# Altium PCB PCB1.PcbDoc
Units mil, origin at the board's own origin, x right, y up, seen from the top; angles counter-clockwise.
Board outline 6000 x 4000 mil, 2 copper layers (Top Layer, Bottom Layer); 94 components, 88 nets, 321 pads, 108 vias.
Unrouted connection lines stored in the file: 2.
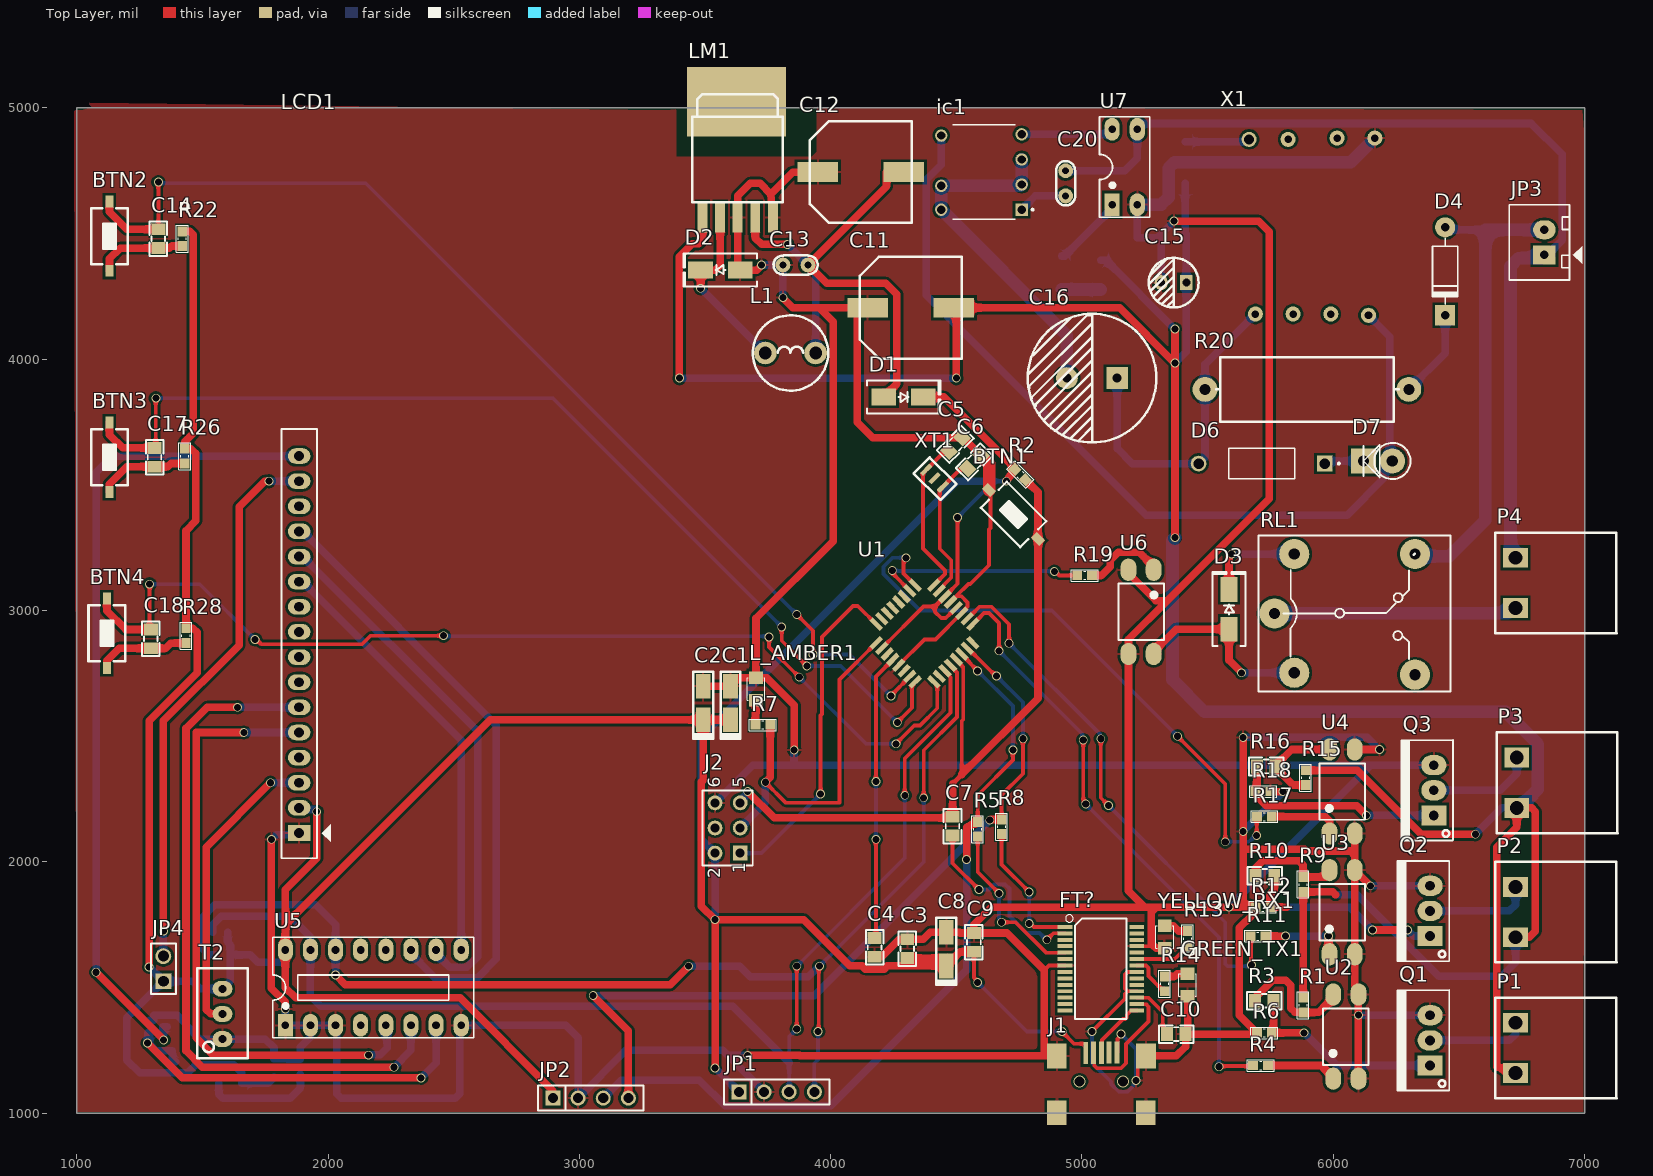
[diagram p0: Top Layer view]
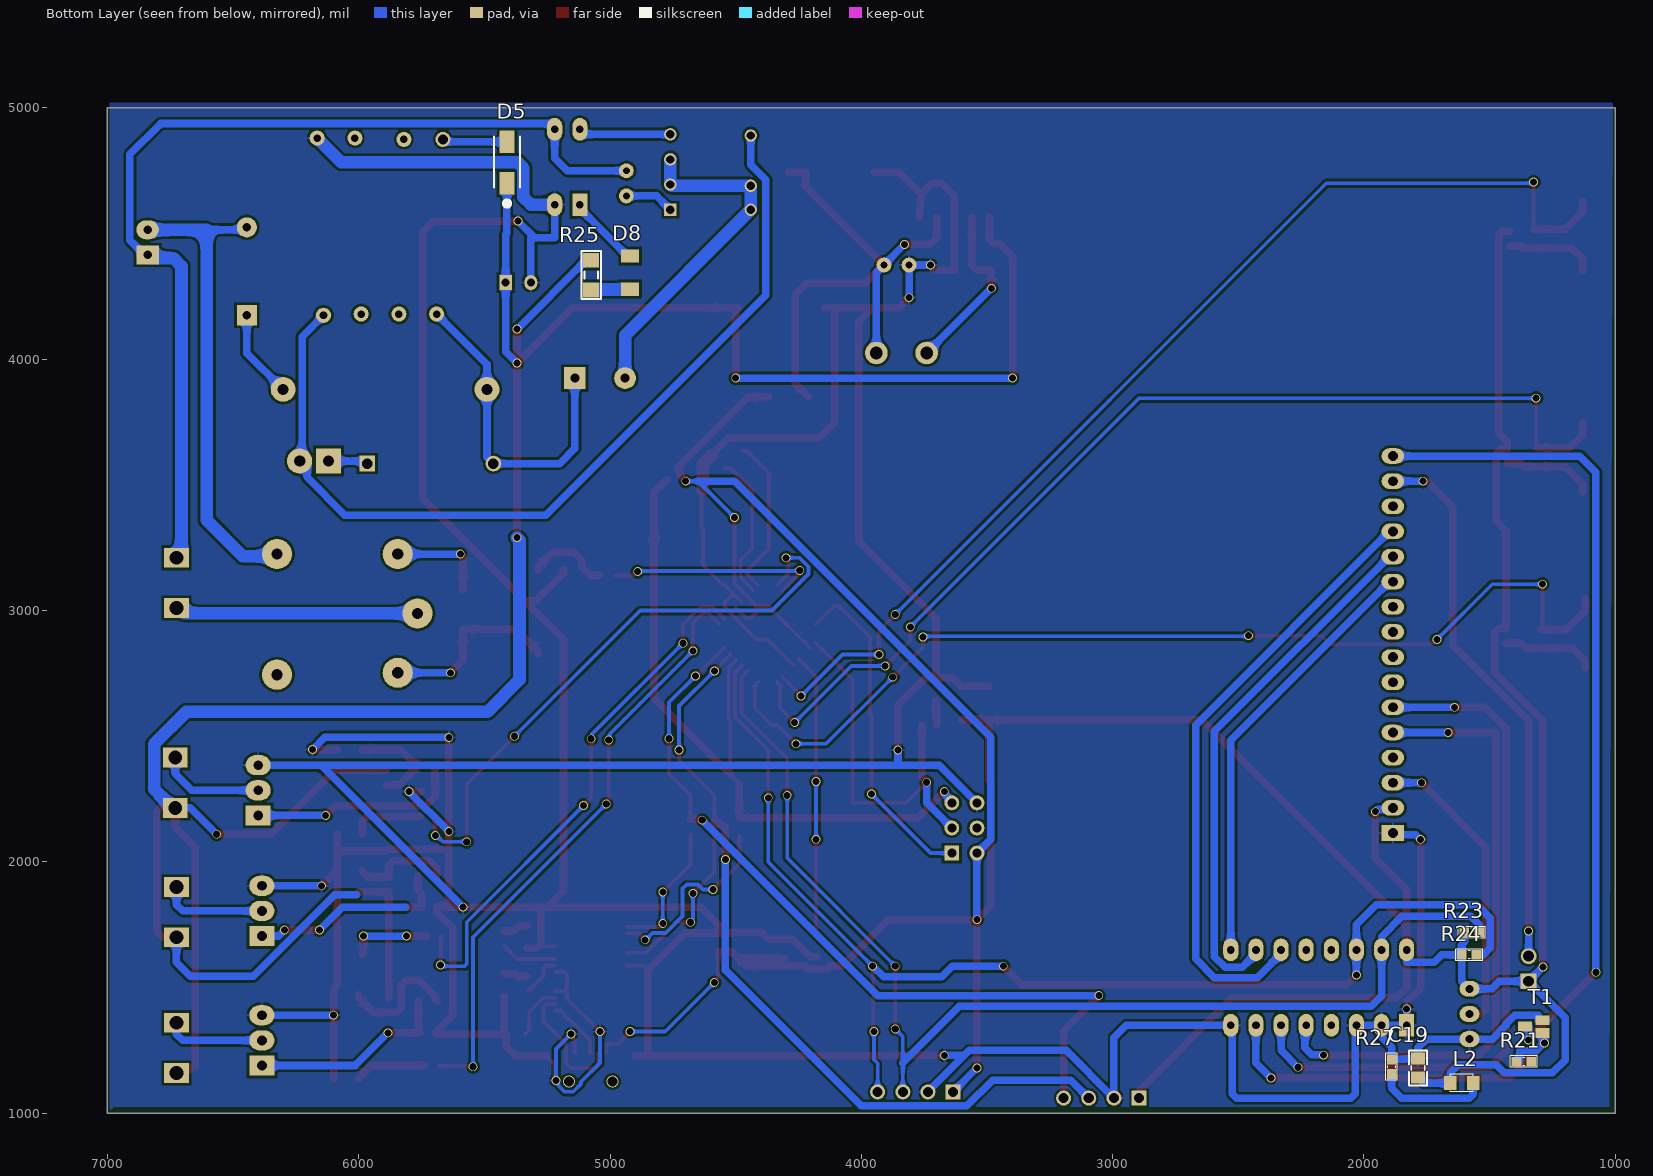
[diagram p1: Bottom Layer view, seen from below]

## Layer stack, top to bottom
Top Solder: solder mask 0.4, Solder Resist, Dk 3.5
Top Layer: signal copper 1.4
Dielectric 1: dielectric 12.6, FR-4, Dk 4.8
Bottom Layer: signal copper 1.4
Bottom Solder: solder mask 0.4, Solder Resist, Dk 3.5

## Board outline
1000,1000 7000,1000 7000,5000 1000,5000

## Design rules (kind name [scope] priority, off if disabled: settings)
Clearance [All] p1: gap=10 ignorepadtopadclearanceinfootprint=FALSE except(0: Arc-Hole Track-Hole SMDPad-Hole THPad-Hole Via-Hole Fill-Hole Poly-Hole Region-Hole Text-Hole)
PolygonConnect [All] p1: connectstyle=Relief reliefconductorwidth=10 reliefentries=4 polygonreliefangle="90 Angle" airgapwidth=10
RoutingVias [All] p1: holewidth=28 width=35 viastyle="Through Hole" minholewidth=28 minwidth=35 maxholewidth=28 maxwidth=35
SolderMaskExpansion SolderMaskExpansion_1 [All] p1: expansion=4 istentingtop=FALSE
SolderMaskExpansion [IsVia] p2: expansion=4 istentingtop=TRUE
Width [All] p1: maxlimit=50 minlimit=15 preferedwidth=30
30 further rules are at their usual default settings.

## Components (designator, comment, footprint, x,y, rotation, side; value= is the part's Value field where it differs from the comment)
BTN1 "Nut Nhan 2 Chan SMD 3x6x2.5" "Nut Nhan 2 Chan SMD 3x6x2.5" 4727.56,3382.44 r315 top
BTN2 "Nut Nhan 2 Chan SMD 3x6x2.5" "Nut Nhan 2 Chan SMD 3x6x2.5" 1130,4490 r90 top
BTN3 "Nut Nhan 2 Chan SMD 3x6x2.5" "Nut Nhan 2 Chan SMD 3x6x2.5" 1130,3610 r90 top
BTN4 "Nut Nhan 2 Chan SMD 3x6x2.5" "Nut Nhan 2 Chan SMD 3x6x2.5" 1120,2910 r90 top
C1 "4.7uF" "tu tantalum smd3216" 3601.5,2632.37 r90 top
C2 "4.7uF" "tu tantalum smd3216" 3492.76,2632.37 r90 top
C3 "0.1uF" "tu 0805" 4305,1655 r270 top
C4 "0.1uF" "tu 0805" 4175,1660 r270 top
C5 "15pF" "tu 0805" 4496.23,3661.42 r45 top
C6 "15pF" "tu 0805" 4571.23,3591.42 r45 top
C7 "0.1uF" "tu 0805" 4484.87,2142.23 r90 top
C8 "4.7uF" "tu tantalum smd3216" 4460,1653.07 r90 top
C9 "0.1uF" "tu 0805" 4570,1680 r270 top
C10 "0.1uF" "tu 0805" 5375,1315 r0 top
C11 "1000uF" "tu nhom 10 (G)" 4318.74,4205 r0 top
C12 "470uF" "tu nhom 10 (G)" 4120,4745 r0 top
C13 "106" "tu gom" 3860,4375 r180 top
C14 "102" "tu 0805" 1325,4480 r270 top
C15 "47uF" "tu hoa 5mm" 5365,4305 r180 top
C16 "10uF" "tu hoa 13mm" 5040,3925 r180 top
C17 "102" "tu 0805" 1310,3610 r270 top
C18 "102" "tu 0805" 1295.13,2887.57 r270 top
C19 "104" "tu 0805" 1785,1180 r270 bottom
C20 "104" "tu gom" 4935,4700 r270 top
D1 "SS34" "DIODE SMA" 4290,3850 r0 top
D2 "SS34" "DIODE SMA" 3561.26,4355 r180 top
D3 "M7" "DIODE SMA" 5585,3005 r90 top
D4 "1N4007" D1A 6445,4525 r90 top
D5 "MBRA160T3G" DIOM5226X220N 5410,4785 r90 bottom
D6 "P6KE200A" DIOAD1276W78L760D360 5715,3585 r180 top
D7 "2A 1000v" "DIODE 2A DUNG" 6175,3595 r0 top
D8 "12V" "DIODE ZENNER SMD SOD80" 4920,4345 r90 bottom
FT? "FT232RL" SSOP28-0.65-10.2X5.2MM 5075,1575 r270 top
GREEN_TX1 "LED2" LED-0805-Green 5420,1465 r90 top
ic1 "TNY266_2" DIP762W46P254L957H406Q7 4610,4745 r180 top
J1 "USB Micro 5p SMD" "USB Mini 5p SMD" 5080,1105 r180 top
J2 "Header 3X2" HDR2X3 3640,2035 r90 top
JP1 "JP 1x4 2.54" "JP 1x4 CT" 3635,1085 r0 top
JP2 "JP 1x4 2.54" "JP 1x4 CT" 2895,1060 r0 top
JP3 "JP2" CON2 6840,4415 r90 top value="Connector 2"
JP4 "JP 1x2 2.54" "JP 1x2 DT" 1345,1525 r90 top
L1 "470uH - 3A" "CUON CAM 100uH3A" 3840,4025 r0 top
L2 "LED 0805" LED-0805-Green 1656,1120 r180 bottom
L_AMBER1 "LED3" LED-0805-Red 3702.87,2643.37 r90 top
LCD1 "LCD1602 XL" "LCD1602 with Jump" 1885,2115 r90 top
LM1 "LM2576 12V SMD" TO263-5 3630,4795 r0 top
P1 "CON 2 EDG5.08" "CON 2 2EDG5.08" 6725,1360 r270 top
P2 "CON 2 EDG5.08" "CON 2 2EDG5.08" 6725,1900 r270 top
P3 "CON 2 EDG5.08" "CON 2 2EDG5.08" 6730,2415 r270 top
P4 "CON 2 EDG5.08" "CON 2 2EDG5.08" 6725,3210 r270 top
Q1 "IRFZ44" TO220 6385,1190 r90 top
Q2 "IRFZ44" TO220 6385,1705 r90 top
Q3 "IRFZ44" TO220 6400,2185 r90 top
R1 "10k" "tro smd 0603" 5880,1430.47 r270 top
R2 "1k" "tro smd 0603" 4754.12,3540.88 r135 top
R3 "100R" "tro smd 0805" 5725,1450 r0 top
R4 "680R" "tro smd 0603" 5710.47,1190 r0 top
R5 "1k" "tro smd 0603" 4585,2130 r90 top
R6 "10k" "tro smd 0603" 5725.47,1320 r180 top
R7 "680R" "tro smd 0603" 3730,2545 r180 top
R8 "1k" "tro smd 0603" 4680,2140 r90 top
R9 "10k" "tro smd 0603" 5880,1910 r90 top
R10 "100R" "tro smd 0805" 5727.23,1947.39 r0 top
R11 "680R" "tro smd 0603" 5700,1705 r0 top
R12 "10k" "tro smd 0603" 5719.53,1820 r180 top
R13 "680R" "tro smd 0603" 5420,1695 r90 top
R14 "680R" "tro smd 0603" 5329.11,1514.96 r90 top
R15 "10k" "tro smd 0603" 5890,2335 r270 top
R16 "100R" "tro smd 0805" 5733.24,2377.61 r180 top
R17 "680R" "tro smd 0603" 5725.47,2180 r0 top
R18 "10k" "tro smd 0603" 5720.47,2280 r0 top
R19 "680R" "tro smd 0603" 5010.47,3140 r0 top
R20 "22R" "tro vach 2w" 5895,3880 r180 top
R21 "4.7k" "tro smd 0603" 1364,1205 r0 bottom
R22 "1k" "tro smd 0603" 1420,4479.53 r270 top
R23 "4.7k" "tro smd 0603" 1571.47,1720 r180 bottom
R24 "4.7k" "tro smd 0603" 1581.47,1630 r180 bottom
R25 "1k" "tro smd 1206" 5075,4335 r270 bottom
R26 "1k" "tro smd 0603" 1430,3615 r270 top
R27 "1k" "tro smd 0603" 1890,1185 r90 bottom
R28 "1k" "tro smd 0603" 1435,2900 r270 top
RL1 "Relay" "Relay 5 Chan SRD" 5765.94,2988.78 r0 top
T1 "BC847" SOT23 1325,1345 r90 bottom
T2 "10K" "Bien Tro Vi Chinh Dung" 1580,1395 r90 top
U1 "ATMEGA168-20AU" ATMEGA168 4370,2905 r225 top
U2 "OPTO PC817 SMD" SOP4 6050,1305 r90 top value=PC817
U3 "OPTO PC817 SMD" SOP4 6035,1800 r90 top value=PC817
U4 "OPTO PC817 SMD" SOP4 6035,2280 r90 top value=PC817
U5 "PCF8574" DIP16 1830,1350 r0 top
U6 "OPTO PC817 SMD" SOP4 5235,2995 r270 top value=PC817
U7 "OPTO PC817 DIP4" DIP4 5120,4612.48 r0 top value=PC817
X1 "flyback tranformer" "flyback transformer" 5690,4180 r90 top
XT1 "16Mhz" "Thach Anh 3 Chan SMD" 4446.81,3493.19 r135 top value=4Mhz
YELLOW_RX1 "LED1" LED-0805-Yellow 5329.11,1656 r90 top

## Footprints (in the part's own frame and the unit in brackets; to place one, negate y for a bottom-side part, rotate by r counter-clockwise, add the part's x,y. Pads: shape width x height; smd on the part's side, far side on the other; paste and mask are expansions set on the pad)
ATMEGA168 [mil]
  rect 58x20 smd: 1(-167,110) 2(-167,79) 3(-167,47) 4(-167,16) 5(-167,-16) 6(-167,-47) 7(-167,-79) 8(-167,-110) 17(157,-110) 18(157,-79) 19(157,-47) 20(157,-16) 21(157,16) 22(157,47) 23(157,79) 24(157,110)
  rect 20x58 smd: 9(-115,-162) 10(-84,-162) 11(-52,-162) 12(-21,-162) 13(11,-162) 14(42,-162) 15(74,-162) 16(105,-162) 25(105,162) 26(74,162) 27(42,162) 28(11,162) 29(-21,162) 30(-52,162) 31(-84,162) 32(-115,162)
  body extent -182,-177 172,177, height 46
"Bien Tro Vi Chinh Dung" [mm] "Bien tro vi chinh"
  oval 1.6x2 hole 0.8: 1(-2.54,0) 2(0,0) 3(2.54,0)
  silkscreen extent -4.47,-2.54 4.6,2.54, body extent -4.54,-2.4 4.66,2.4, height 12.02
CON2 [mil] "CON2"
  rect 75x90 hole 34: 1(0,0)
  oval 75x90 hole 34: 2(100,0)
  silkscreen extent -100,-150 200,140, body extent -68,-70 168,107, height 236
"CON 2 2EDG5.08" [mm]
  rect 2x2.5 hole 1.4: 1(0,0) 2(5.08,0)
  silkscreen extent -2.54,-2.03 7.62,10.21, body extent -2.5,-1.75 7.58,10.25, height 3.15
"CUON CAM 100uH3A" [mil] "100uH3A"
  round 90 hole 50: 1(-100,0) 2(100,0)
  silkscreen extent -150,-150 150,150, body extent -171,-175 171,167, height 394
D1A [mil] "Diode 1A, W 100mil, L 350mil"
  round 80 hole 35: 1(0,0)
  rect 80x80 hole 35: 2(-350,0)
  silkscreen extent -305,-50 -45,50, body extent -386,-33 34,36, height 84
DIOAD1276W78L760D360 [mm]
  round 1.59 hole 1.06: A(6.38,0)
  rect 1.59x1.59 hole 1.06: C(-6.38,0)
  silkscreen extent -7.89,-1.55 3.35,1.55, body extent -6.9,-1.8 6.9,1.8, height 3.6
"DIODE 2A DUNG" [mil] "Diode 2A DUNG"
  round 100 hole 45: 1(60,0)
  rect 100x100 hole 45: 2(-55,0)
  silkscreen extent -55,-72 132,72, body extent -69,-50 99,55, height 252
"DIODE SMA" [mm] "SMA"
  rect 2.5x1.7 smd: 1(-2,0) 2(2,0)
  silkscreen extent -3.68,-1.65 3.75,1.65, body extent -2.6,-1.37 2.6,1.37, height 2.4
"DIODE ZENNER SMD SOD80" [mm] "SOD80"
  rect 1.35x1.8 smd: 1(1.675,0) 2(-1.675,0)
  body extent -1.75,-0.76 1.75,0.74, height 1.45
DIOM5226X220N [mm]
  rect 2.3x1.55 smd: A(2.032,0) C(-2.15,0)
  silkscreen extent -4.62,-1.3 2.6,1.3, body extent -2.47,-1.49 2.73,1.24, height 2.7
DIP4 [mil] "W.300/L.400"
  rect 60x90 hole 31: 1(0,2.52)
  oval 60x90 hole 31: 2(100,2.52) 3(100,302.52) 4(0,302.52)
  silkscreen extent -50,-47 150,353, body extent -59,-7 159,307, height 170
DIP16 [mil] "16 PIN, W 300mil, Pin to pin 100mil"
  rect 60x90 hole 31: 1(0,0)
  oval 60x90 hole 31: 2(100,0) 3(200,0) 4(300,0) 5(400,0) 6(500,0) 7(600,0) 8(700,0) 9(700,300) 10(600,300) 11(500,300) 12(400,300) 13(300,300) 14(200,300) 15(100,300) 16(0,300)
  silkscreen extent -50,-50 750,350, body extent -52,-57 752,356, height 299
DIP762W46P254L957H406Q7 [mm]
  rect 1.25x1.25 hole 0.83: 1(-3.81,3.81)
  round 1.25 hole 0.83: 2(-3.81,1.27) 3(-3.81,-1.27) 4(-3.81,-3.81) 5(4.318,-3.683) 7(4.318,1.397) 8(4.318,3.81)
  silkscreen extent -5.02,-4.79 3.18,4.79, body extent -4.27,-4.59 4.78,4.85, height 4.06
"flyback transformer" [mil]
  round 60 hole 30: 1(0,0) 7(-5,-450) 8(700,-475) 19(0,-150) 20(0,-300) 23(695,-130) 24(700,-325)
  round 60 hole 40: 2(695,25)
  body extent -70,-599 796,149, height 561
HDR2X3 [mm] "Connector; Header; 3x2 Position"
  rect 1.5x1.5 hole 0.9: 1(0,0)
  round 1.5 hole 0.9: 2(0,2.54) 3(2.54,0) 4(2.54,2.54) 5(5.08,0) 6(5.08,2.54)
  silkscreen extent -1.27,-1.27 6.35,3.81
"JP 1x2 DT" [mm] "2 pins, 1 row, straight, gold plating"
  rect 1.6x1.6 hole 1.1: 1(0,0)
  round 1.6 hole 1.1: 2(2.54,0)
  silkscreen extent -1.27,-1.27 3.81,1.27, body extent -1.27,-1.27 3.81,1.27, height 8.54
"JP 1x4 CT" [mm]
  rect 1.52x1.52 hole 1.02: 1(0,0)
  round 1.52 hole 1.02: 2(2.54,0) 3(5.08,0) 4(7.62,0)
  silkscreen extent -1.52,-1.27 9.14,1.27, body extent -1.52,-1.25 9.14,1.25, height 8.51
"LCD1602 with Jump" [mil] "LCD dipslay 16x2, 16 pin"
  rect 62x90 hole 39: 1(0,0)
  oval 62x90 hole 39: 2(100,0) 3(200,0) 4(300,0) 5(400,0) 6(500,0) 7(600,0) 8(700,0) 9(800,0) 10(900,0) 11(1000,0) 12(1100,0) 13(1200,0) 14(1300,0) 15(1400,0) 16(1500,0)
  silkscreen extent -100,-125 1608,70, body extent -320,-1353 2850,84, height 764
LED-0805-Green [mil]
  rect 50x55 smd: 1(0,0) 2(90,0)
  silkscreen extent 0,-35 90,35, body extent 5,-25 85,25, height 43
LED-0805-Red [mil]
  rect 50x55 smd: 1(0,0) 2(90,0)
  silkscreen extent 0,-35 90,35, body extent 5,-25 85,25, height 43
LED-0805-Yellow [mil]
  rect 50x55 smd: 1(0,0) 2(90,0)
  silkscreen extent 0,-35 90,35, body extent 5,-25 85,25, height 43
"Nut Nhan 2 Chan SMD 3x6x2.5" [mm] "Switch SMD type"
  rect 1.2x0.8 smd: 1(-3.5,0) 2(3.5,0)
  silkscreen extent -2.82,-1.85 2.82,1.85, body extent -3.05,-1.85 3.05,1.85, height 2.5
"Relay 5 Chan SRD" [mil] "Relay SPDT, 5 pin, 10A,W 650mil, L 800mil, H 800mil"
  round 120 hole 45: 1(0,0) 2(559.06,236.22) 3(559.06,-243.78) 4(78.74,-236.22) 5(78.74,236.22)
  silkscreen extent -63,-311 700,310, body extent -55,-306 697,304, height 602
SOP4 [mm]
  oval 2.25x1.6 smd: 1(-4.25,1.27) 2(-4.25,-1.27) 3(4.25,-1.27) 4(4.25,1.27)
  silkscreen extent -2.85,-2.3 2.85,2.3, body extent -4.67,-2.29 4.93,2.31, height 3.6
SOT23 [mm]
  rect 1x1.4 smd: 1(-0.635,-0.889) 2(0.635,-0.889) 3(0,0.889)
  body extent -0.3,-0.49 0.3,0.51, height 0.45
SSOP28-0.65-10.2X5.2MM [mm]
  rect 0.4x1.5 smd: 1(-4.225,-3.625) 2(-3.575,-3.625) 3(-2.925,-3.625) 4(-2.275,-3.625) 5(-1.625,-3.625) 6(-0.975,-3.625) 7(-0.325,-3.625) 8(0.325,-3.625) 9(0.975,-3.625) 10(1.625,-3.625) 11(2.275,-3.625) 12(2.925,-3.625) 13(3.575,-3.625) 14(4.225,-3.625) 15(4.225,3.625) 16(3.575,3.625) 17(2.925,3.625) 18(2.275,3.625) 19(1.625,3.625) 20(0.975,3.625) 21(0.325,3.625) 22(-0.325,3.625) 23(-0.975,3.625) 24(-1.625,3.625) 25(-2.275,3.625) 26(-2.925,3.625) 27(-3.575,3.625) 28(-4.225,3.625)
  silkscreen extent -5.46,-3.55 5.1,2.6
"Thach Anh 3 Chan SMD" [mm] "SMD Crystal CMR309T package"
  rrect25% 0.45x1.35 smd: 1(0,0) 2(1.2,0) 3(2.4,0)
  silkscreen extent -0.76,-1.14 3.05,1.14, body extent -0.41,-0.63 2.79,0.67, height 1.02
TO220 [mil] "TO-220"
  rect 80x100 hole 39: 1(0,0)
  oval 80x100 hole 39: 2(100,0) 3(200,0)
  silkscreen extent -100,-76 300,130, body extent -95,-80 295,97, height 323
TO263-5 [mil] "TO263-5"
  rect 39.37x120 smd: 1(-140,-230) 2(-70,-230) 3(0,-230) 4(70,-230) 5(140,-230)
  rect 393.7x275.59 smd: 6(-5,230)
  silkscreen extent -180,-170 180,260, body extent -200,-242 200,310, height 180
"tro smd 0603" [mm] "Chip Capacitor, 2-Leads, Body 1,60x0,80mm, IPC Medium Density"
  rect 1x0.95 smd mask+0.076: 1(-0.75,0) 2(0.75,0)
  silkscreen extent -1.35,-0.58 1.37,0.58, body extent -0.82,-0.42 0.82,0.43, height 0.44
"tro smd 0805" [mm]
  rect 1.2x1.4 smd: 1(-0.946,-0.061) 2(0.954,-0.061)
  silkscreen extent -1.75,-0.97 1.75,0.84, body extent -1.56,-0.76 1.44,0.64, height 0.53
"tro smd 1206" [mm]
  rect 1.5x1.6 smd: 1(-1.5,0) 2(1.5,0)
  silkscreen extent -2.44,-0.99 2.44,0.99, body extent -1.6,-0.8 1.6,0.8, height 0.6
"tro vach 2w" [mm]
  round 2.5 hole 1.1: 1(-10.3,0) 2(10.3,0)
  silkscreen extent -9.27,-3.25 9.14,3.25, body extent -10.56,-2.5 10.56,2.5, height 5.5
"tu 0805" [mm] "Compoment SMD 80x50mil"
  rect 1.2x1.4 smd: 1(-0.946,-0.003) 2(0.954,-0.003)
  silkscreen extent -1.75,-0.89 1.75,0.89, body extent -1.01,-0.64 1.01,0.63, height 0.61
"tu gom" [mm] "Tu gom mini"
  round 1.5 hole 0.7: 1(-1.27,0) 2(1.27,0)
  silkscreen extent -2.25,-0.97 2.22,0.97, body extent -2.92,-0.85 2.92,0.85, height 6.12
"tu hoa 5mm" [mm]
  rect 1.3x1.5 hole 0.8: 1(-1.27,0)
  oval 1.3x1.5 hole 0.8: 2(1.27,0)
  silkscreen extent -2.51,-2.51 2.51,2.51, body extent -3.12,-3.18 3.23,3.18, height 14.55
"tu hoa 13mm" [mm]
  rect 2.2x2.2 hole 0.9: 1(-2.54,0)
  round 2.2 hole 0.9: 2(2.54,0)
  silkscreen extent -6.5,-6.5 6.5,6.5, body extent -6.25,-6.25 6.26,6.25, height 23.02
"tu nhom 10 (G)" [mm]
  rect 4.1x2 smd: 1(-4.35,0) 2(4.35,0)
  silkscreen extent -5.15,-5.15 5.15,5.15, body extent -5.9,-5.25 5.9,5.25, height 10.5
"tu tantalum smd3216" [mm]
  rect 2.5x1.5 smd: 1(-1.7,0) 2(1.7,0)
  silkscreen extent -3.61,-1 3.17,1, body extent -1.7,-0.9 1.7,0.9, height 1.69
"USB Mini 5p SMD" [mm]
  rect 0.5x2.25 smd: 1(1.651,-3.429) 2(0.864,-3.442) 3(0.076,-3.454) 4(-0.711,-3.467) 5(-1.499,-3.48)
  rect 2x2.5 smd: 5(-4.424,-3.124) 5(-4.42,2.616) 5(4.576,-3.124) 5(4.58,2.616)
  body extent -5.27,-3.8 5.43,5.4, height 3.95

## Part data
C1 C2 C8: library part "Tu tantalum 4.7uF 16V SMD3216", "Dán", Chung_Loai=Dán, Don_Vi=Con, Ma_Hang=MH008686, So_Chan=2, Ten_Linh_Kien="Tụ tantalum 475C-4.7uF 16V SMD3216"
C3 C4 C7 C9 C10: library part "Tu 0805 10pF 50V 10%", "Dán", Chung_Loai=Dán, Don_Vi=Con, Ma_Hang=MH004554, So_Chan=2, Ten_Linh_Kien="Tụ 0805 10P 10% 50V"
C5 C6: library part "Tu 0805 15pF 50V 10%", "Dán", Chung_Loai=Dán, Don_Vi=Con, Ma_Hang=MH004556, So_Chan=2, Ten_Linh_Kien="Tụ 0805 15P 10% 50V"
C11: library part "Tu Nhom 1000uF 10V", "Dán", Chung_Loai=Dán, Don_Vi=Con, Ma_Hang=MH007515, So_Chan=2, Ten_Linh_Kien="Tụ Nhôm 1000uF 10V"
C12: library part "Tu Nhom 470uF 35V", "Dán", Chung_Loai=Dán, Don_Vi=Con, Ma_Hang=MH004418, So_Chan=2, Ten_Linh_Kien="Tụ Nhôm 470uF 35V 10x10.5MM"
C13 C20: library part "Tu gom 104 50V", "Cắm", Chung_Loai=Cắm, Don_Vi=Con, Ma_Hang=MH004761, So_Chan=2, Ten_Linh_Kien="Tụ gốm 104 100nF 50V"
C14 C17 C18: library part "Tu 0805 102 50V 10%", "Dán", Chung_Loai=Dán, Don_Vi=Con, Ma_Hang=MH004549, So_Chan=2, Ten_Linh_Kien="Tụ 0805 102-1nF 10% 50V"
C15: library part "Tu Hoa 47uF 25V 5x8", "Cắm", Chung_Loai=Cắm, Don_Vi=Con, Ma_Hang=MH006860, So_Chan=2, Ten_Linh_Kien="Tụ Hóa 47uF 25V"
C16: library part "Tu Hoa 10uF 450V 13x20", "Cắm", Chung_Loai=Cắm, Don_Vi=Con, Ma_Hang=MH003950, So_Chan=2, Ten_Linh_Kien="Tụ Hóa 10uF 450V 13x20MM"
C19: library part "Tu 0805 104 50V 10%", "Dán", Chung_Loai=Dán, Don_Vi=Con, Ma_Hang=MH004551, So_Chan=2, Ten_Linh_Kien="Tụ 0805 104-100nF 10% 50V"
D1 D2: library part "Diode SS34 ( 1N5822 )", "Dán", Chung_Loai=Dán, Don_Vi=Con, Ma_Hang=MH002104, Ten_Linh_Kien="Diode SS34 3A 40V SMA ( 1N5822 SS34A)"
D3: library part "Diode M7 ( 4007 )", "Dán", Chung_Loai=Dán, Don_Vi=Con, Ma_Hang=MH000944, Ten_Linh_Kien="Diode M7 1N4007 SMD 1A 1000V"
D4: library part D1A, "Diode 1A"
D5: "Diode Schottky 60V 1A Surface Mount SMA", Package="DO-214 ON Semiconductor", Availability=Unavailable, MF="ON Semiconductor", MP=MBRA160T3G, Price=None, SnapEDA_Link=https://www.snapeda.com/parts/MBRA160T3G/ON%20Semiconductor/view-part/313183/?ref=snap
D6: "600W, 200V, 5%, Unidirectional, TVS", Package="AXIAL-2 Taiwan Semiconductor", Availability="In Stock", MF="Taiwan Semiconductor", MP=P6KE200A, Price=None, Purchase-URL=https://pricing.snapeda.com/search/part/P6KE200A/?ref=eda
D7: library part "Diode FR207", "Cắm", Chung_Loai=Cắm, Don_Vi=Con, Ma_Hang=MH005704, Ten_Linh_Kien="Diode FR207 2A 1000V ( DIP)"
D8: library part "Diode Zener 12V", "Dán", Chung_Loai=Dán, Don_Vi=Con, Ma_Hang=MH000945, Ten_Linh_Kien="Diode Zener 1/2W 12V SMD1206 ZMM12"
GREEN_TX1 L2: library part "LED 0805 Xanh La", "Dán", Chung_Loai=Dán, Don_Vi=Con, Ma_Hang=MH002326, Ten_Linh_Kien="LED 0805 Màu Xanh Lá (Green)"
J1: "USB Type B", Ma_Hang=MH001020, Ten="MicroUSB MK5P SMD"
J2: "Header, 3-Pin, Dual row", LatestRevisionDate=17-Jul-2002, LatestRevisionNote="Re-released for DXP Platform.", Publisher="Altium Limited"
JP1 JP2: library part "JP 1x4 2.54 Cai Thang", "Cắm", Chung_Loai=Cắm, Don_Vi=Con, Ma_Hang=MH004006, Ten_Linh_Kien="Jump Đơn Cái 2.54MM 1x20P Thẳng"
JP3: library part Con2, "Connector 2"
JP4: library part "JP 1x2 2.54 Duc Thang", "Cắm", Chung_Loai=Cắm, Don_Vi=Con, Ma_Hang=MH000903, Ten_Linh_Kien="Jump Đơn Đực 2.54MM 1x40P Thẳng 11MM"
L1: library part "CUON CAM 470uH DIP", "Cắm", Chung_Loai=Cắm, Don_Vi=Con, Ma_Hang=MH002232, Ten_Linh_Kien="Cuộn Cảm 470uH 3A 8x10MM"
L_AMBER1: library part "LED 0805 Do", "Dán", Chung_Loai=Dán, Don_Vi=Con, Ma_Hang=MH000897, Ten_Linh_Kien="LED 0805 Màu Đỏ (Red)"
LCD1: "LCD 1602 Xanh Lá", CHIP=HD44780, Ma_Hang=67HZ, NCC=NSHOP, Ten="Màn hình LCD 1602 Xanh Lá"
LM1: "Dán", Chung_Loai=Dán, Don_Vi=Con, Ma_Hang=MH002369, Ten_Linh_Kien="LM2576HVS-12V BUCK 12V 3A TO263-5"
P1 P2 P3 P4: "Cắm", Chung_Loai=Cắm, Don_Vi=Con, Ma_Hang=MH000759, Ten_Linh_Kien="CON 2 2EDG5.08-2P 5.08MM ( Xanh Cong)"
Q1 Q2 Q3: library part "IRFZ44 DIP", "N-Channel Power MOSFET"
R1 R6 R9 R12 R15 R18: library part "Tro 0603 1% 10k", "Dán", Chung_Loai=Dán, Don_Vi=Con, Ma_Hang=MH006333, So_Chan=2, Ten_Linh_Kien="Trở 0603 1% 10k"
R2 R5 R8 R27: library part "Tro 0603 1% 1k", "Dán", Chung_Loai=Dán, Don_Vi=Con, Ma_Hang=MH006334, So_Chan=2, Ten_Linh_Kien="Trở 0603 1% 1k"
R3 R10 R16: library part "Tro 0805 5% 100R", "Dán", Chung_Loai=Dán, Don_Vi=Con, Ma_Hang=MH005251, So_Chan=2, Ten_Linh_Kien="Trở 0805 5% 100R"
R4 R7 R11 R13 R14 R17 R19: library part "Tro 0603 1% 680R", "Dán", Chung_Loai=Dán, Don_Vi=Con, Ma_Hang=MH006336, So_Chan=2, Ten_Linh_Kien="Trở 0603 1% 680R"
R20: library part "Tro Vach 2W 5% 22R", "Cắm", Chung_Loai=Cắm, Don_Vi=Con, Ma_Hang=MH006369, So_Chan=2, Ten_Linh_Kien="Trở 5% 2w 22R"
R21 R23 R24: library part "Tro 0603 5% 4.7k", "Dán", Chung_Loai=Dán, Don_Vi=Con, Ma_Hang=MH006327, So_Chan=2, Ten_Linh_Kien="Trở 0603 5% 4.7k"
R22 R26 R28: library part "Tro 0603 5% 1k", "Dán", Chung_Loai=Dán, Don_Vi=Con, Ma_Hang=MH006319, So_Chan=2, Ten_Linh_Kien="Trở 0603 5% 1k"
R25: library part "Tro 1206 1% 1k", "Dán", Chung_Loai=Dán, Don_Vi=Con, Ma_Hang=MH005880, So_Chan=2, Ten_Linh_Kien="Trở 1206 1% 1k"
RL1: library part "Relay 5 Chan SRD", "Relay 5 Chan", Ma_Hang=MH009374, Ten="Relay 5V10A SRD-05VDC-SL-C Chính Hãng"
T1: "Bipolar _BJT_ Transistor NPN 45V 100mA 100MHz 150mW Surface Mount SOT-523", Package="SOT-523 Rectron", Availability=Unavailable, MF=Rectron, MP=BC847, Price=None, SnapEDA_Link=https://www.snapeda.com/parts/BC847/Rectron/view-part/4637030/?ref=snap
T2: library part "Bien Tro Tinh Chinh 10K Dung", "Cắm", Chung_Loai=Cắm, Don_Vi=Con, Ma_Hang=MH003232, Ten_Linh_Kien="Biến Trở VR 103-10K 3296W"
U1: "AVR AVRÂ® ATmega Microcontroller IC 8-Bit 20MHz 16KB _8K x 16_ FLASH 32-TQFP _7x7_", Package="TQFP-32 Microchip", Availability=Unavailable, MF=Microchip, MP=ATMEGA168-20AU, Price=None, SnapEDA_Link=https://www.snapeda.com/parts/ATMEGA168-20AU/Microchip/view-part/776709/?ref=snap
U2 U3 U4 U6 U7: "Single Opto"
U5: "I2C PORT EXPANDER", Frequency - Clock=100KHz, Manufacturer="NXP Semiconductors", Manufacturer Part Number=PCF8574T/3,512, Operating Temperature="-40°C ~ 85°C", Package / Case="16-SOIC (7.5mm Width)", Supplier Part Number=568-1076-5-ND, Voltage - Supply="2.5 V ~ 6 V", Category="Integrated Circuits (ICs)", Includes=POR, Interface=I²C, Interrupt Output=Yes, Number of I /O=8, Packaging=Tube, RoHS="RoHS Compliant", Supplier=Digi-Key, Supplier 1=Digi-Key, Supplier Part Number 1=568-1076-5-ND
XT1: library part "Thach anh 3 Chan SMD", "Crystal For all Crystal 2pin."
YELLOW_RX1: library part "LED 0805 Vang", "Dán", Chung_Loai=Dán, Don_Vi=Con, Ma_Hang=MH002329, Ten_Linh_Kien="LED 0805 Màu Vàng ( Yellow)"
BTN1 BTN2 BTN3 BTN4: Ma_Hang=MH001036, Ten="Nút Nhấn 2 Chân 3x6x2.5MM SMD"

## Via types
v1: diameter 35, hole 28, Top Layer to Bottom Layer, 106 vias
v2: diameter 47.24, hole 39.37, Top Layer to Bottom Layer, 2 vias

## Nets (pads, with @x,y where several pads share a name; then routed paths per layer and width w, separated by ;. In a path a pad name is that pad's centre, name@x,y a point inside that pad or via, vN(x,y) a via of type N, cw(c..) or ccw(c..) an arc to the next point about the centre after c; other vN are vias at no path point)
3V3: C10.1 FT?.17 | length 221.8
  Top Layer w15: FT?.17 5217.93,1459.63 5264.26,1459.63 5321.65,1402.23 5321.65,1330.99 C10.1
220_1: D4.1 JP3.2 RL1.2 | length 1897.8
  Bottom Layer w30: D4.1 6455,4515 6605,4515
  Bottom Layer w50: RL1.2 6334.29,3215.71 6460.71,3215.71 6605,3360 6605,4515 JP3.2
220_2: C20.1 JP3.1 P4.1 U7.3 | length 3945.9
  Bottom Layer w30: C20.1 5170,4750 5220,4800 U7.3 5220,4938 6788,4938 6910,4816 6910,4474 6851,4415 JP3.1
  Bottom Layer w50: P4.1 6719.37,3210 6705,3224.37 6705,4370 6737.5,4402.5 6827.5,4402.5 JP3.1
+5: C1.1 C2.1 C3.2 C8.1 C9.2 C19.2 D1.2 J1.1 J2.2 JP1.1 JP2.1 JP4.1 L2.1 LCD1.2 R2.2 R22.1 R23.1 R24.1 R26.1 R28.1 T2.3 U1.4 U1.6 U1.18 U5.16 | length 16756
  Top Layer w15: U1.18 4369.74,3016.47 4415,3016.47 ; U1.4 4457.63,2970 4440,2970 4415,2995 4415,3016.47 ; v1(4505,3370) 4505,3106.47 U1.6 4415,3016.47 ; C9.2 4569.87,1540.55 4585,1525.41 v1(4585,1520) ; v1(4920,1325) 4968.21,1276.79 5012.66,1276.79 5015,1274.45 J1.1
  Top Layer w30: v1(1288,1582) 1288,2561 1479,2752 1479,2913.03 1462.5,2929.53 R28.1 1435,3318 1474,3357 1474,3625 1454.47,3644.53 R26.1 1430,3671 1464,3705 1464,4495.06 1450,4509.06 R22.1 ; v1(1955,2200) 1955,2014 1830,1889 1830,1750 ; JP2.1 2895,1090 2526,1459 1871,1459 1830,1500 U5.16 1830,1750 ; v1(3540,1180) v1(3540,1770) ; C1.1 C2.1 C2.1@3492.76,2565 ; C3.2 4460,1617.43 C8.1 ; D1.2 4450.64,3850 4733.24,3567.4 R2.2 4699.47,3515.64 v1(4699,3515) ; C9.2 4516.28,1642.43 C8.1 ; 1830,1750 2645,2565 C2.1@3492.76,2565 ; C2.1@3492.76,2565 3492.76,2325.47 3485.47,2318.18 3485.47,1824.53 v1(3540,1770) ; v1(3540,1770) 3892.49,1770 4076.34,1586.14 4124.61,1586.14 4136.95,1573.8 4212.78,1573.8 4225.12,1586.14 C8.1
  Bottom Layer w15: v1(4505,3370) 4650,3515 v1(4699,3515) ; v1(4585,1520) 4780,1325 v1(4920,1325)
  Bottom Layer w30: v1(1288,1582) JP4.1 ; R23.1 1601,1680 1611,1670 R24.1 ; C19.2 1762.71,1120 L2.1 1656,1162 1625,1193 1473,1193 1441,1161 1250,1161 1200,1211 1200,1380 JP4.1 ; U5.16 1830,1600 1720,1600 1690,1630 R24.1 ; LCD1.2 1891.12,2208.88 1944.77,2208.88 1953.65,2200 v1(1955,2200) ; v1(3540,1180) JP1.1 ; v1(3540,1770) J2.2 3485,2090 3485,2495.46 4504.54,3515 4650,3515 ; JP4.1 1462,1525 1492,1495 T2.3 1611,1526 R24.1
+5V: FT?.4
+12: C11.2 C15.1 D5.C LM1.1 P1.2 P2.2 P3.2 R1.1 R9.1 R15.1 R25.1 | length 11746.9
  Top Layer w30: v1(3398.31,3925) 3398.31,4408.31 3450,4460 3475,4460 3490,4475 LM1.1 ; C11.2 C11.2@4500,4205 ; v1(4500,3925) C11.2@4500,4205 ; v1(5370,3290) v1(5370,3985) ; v1(5370,4120) v1(5370,3985) ; R1.1 R9.1 5998.17,1880.47 6008.65,1870 ; R15.1 6095.12,2364.53 6349.64,2110 v1(6565,2110) ; P1.2 6650,1185 6650,2058 6730,2138 P3.2 6789,2215 6804,2200 6804,1725 6779,1700 P2.2 ; C11.2@4500,4205 5150,4205 v1(5370,3985)
  Bottom Layer w30: v1(3398.31,3925) v1(4500,3925) ; R25.1 5095.94,4394.06 v1(5370,4120) ; v1(5370,3985) 5415,4030 C15.1 5415,4497 5410,4502 D5.C ; 6008.65,1870 6094.64,1870 6419.64,1545 6670,1545 6725,1600 P2.2 ; v1(6565,2110) 6670,2215 P3.2 P3.2@6739.84,2215
  Bottom Layer w50: v1(5370,3290) 5360,3280 5360,2725 5488.07,2596.93 6686.15,2596.93 6814.21,2468.87 6814.21,2289.37 P3.2@6739.84,2215
A: JP4.2 LCD1.15 | length 2193.9
  Top Layer w30: v1(1345,1725) 1345,2561 1646,2862 1646,3413 1748,3515 v1(1765,3515)
  Bottom Layer w30: JP4.2 v1(1345,1725) ; v1(1765,3515) LCD1.15
A0: BTN2.2 C14.1 U1.23 | length 4379.1
  Top Layer w15: C14.1 1325,4517.36 v1(1325,4705) ; v1(3865,2985) 3930,2920 v1(3930,2825) ; v1(4240,2660) 4240,2661.64 4314.85,2736.48 U1.23
  Top Layer w30: BTN2.2 1130,4587.23 1200,4517.23 C14.1
  Bottom Layer w15: v1(1325,4705) 1328.79,4705 1333.79,4700 2150,4700 v1(3865,2985) ; v1(3930,2825) 4075,2825 v1(4240,2660)
A1: BTN3.2 C17.1 U1.24 | length 4156.9
  Top Layer w15: C17.1 1315,3652.36 v1(1315,3845) ; v1(3805,2935) 3805,2880 v1(3905,2780) ; v1(4265,2555) 4323.33,2613.33 4323.33,2702.77 U1.24
  Top Layer w30: BTN3.2 1130,3700 1182.77,3647.23 C17.1
  Bottom Layer w15: v1(1315,3845) 2895,3845 v1(3805,2935) ; v1(3905,2780) 4040,2780 v1(4265,2555)
A2: BTN4.2 C18.1 U1.25 | length 4053.3
  Top Layer w15: v1(1290,3105) 1290,2929.8 C18.1 ; v1(1710,2885) 1715.41,2885 1733.91,2866.5 2136,2866.5 2169.5,2900 v1(2460,2900) ; v1(3755,2895) 3755,2855 v1(3875,2735) ; v1(4260,2470) 4332.52,2542.52 4355.09,2542.52 4423.79,2611.21 4423.74,2611.26 4423.74,2702.77 U1.25
  Top Layer w30: BTN4.2 1120,3000 1195.2,2924.8 C18.1
  Bottom Layer w15: v1(1290,3105) 1490,3105 v1(1710,2885) ; v1(2460,2900) 2462.5,2897.5 3752.5,2897.5 v1(3755,2895) ; v1(3875,2735) 4140,2470 v1(4260,2470)
A3: U1.26
A4: JP1.3 R23.2 U1.27 U5.15 | length 4667.6
  Top Layer w15: v1(3865,1335) v1(3865,1585) ; v1(4295,2265) 4295,2411.44 4477.3,2593.74 4477.3,2734.76 4454.85,2757.21 U1.27
  Bottom Layer w15: JP1.3 3835,1200 3835,1305 v1(3865,1335) ; v1(3865,1585) 4295,2015 v1(4295,2265)
  Bottom Layer w30: R23.2 1541.94,1750 1574.94,1783 1850,1783 1930,1703 U5.15 1930,1467 1971.5,1425.5 3609.5,1425.5 3835,1200
A5: JP1.4 R24.2 U1.28 U5.14 | length 4922.5
  Top Layer w15: v1(3950,1325) 3952.5,1327.5 3952.5,1582.5 v1(3955,1585) ; v1(4370,2255) 4370,2444.01 4502.3,2576.31 4502.3,2753.61 4476.77,2779.13 U1.28
  Top Layer w30: v1(2030,1550) 2069,1511 3361,1511 v1(3435,1585)
  Bottom Layer w15: JP1.4 3935,1198.95 3950,1213.95 v1(3950,1325) ; v1(3955,1585) 4370,2000 v1(4370,2255)
  Bottom Layer w30: R24.2 1525,1630 1497,1658 1497,1776 1550,1829 1951,1829 2030,1750 U5.14 v1(2030,1550) ; v1(3435,1585) 3638.23,1585 3680.73,1542.5 3911.15,1542.5 3953.65,1585 v1(3955,1585)
A6: U1.19
A7: U1.22
AREF: C4.1 U1.20 | length 1138.2
  Top Layer w15: C4.1 4180,1702.36 v1(4180,2090) ; v1(4180,2320) 4180,2737.63 U1.20
  Bottom Layer w15: v1(4180,2090) v1(4180,2320)
CS: LCD1.6 U5.6 | length 2817.5
  Top Layer w30: v1(1640,2615) 1519,2615 1435,2531 1435,1248 1500,1183 v1(2263,1183)
  Bottom Layer w30: v1(1640,2615) LCD1.6 ; v1(2263,1183) 2330,1250 U5.6
D0/RX: JP2.3 R5.2 U1.30 | length 3169.2
  Top Layer w15: U1.30 4521.32,2824.97 4556.61,2789.68 4556.61,2788.39 4584.65,2760.35 v1(4584.65,2759.65) ; R5.2 4585,2265 4725,2405 v1(4725,2445)
  Top Layer w30: v1(4541,2010) 4541,2138.03 R5.2
  Bottom Layer w15: v1(4584.65,2759.65) 4585.35,2759.65 4725,2620 v1(4725,2445)
  Bottom Layer w30: JP2.3 3167,1132 3478,1132 3580,1030 4001,1030 4541,1570 v1(4541,2010)
D1/TX: JP2.4 R8.2 U1.31 | length 3192.3
  Top Layer w15: U1.31 4547.05,2849.85 4656.9,2740 v1(4660,2740) ; R8.2 4680,2265.86 4765,2350.86 v1(4765,2490)
  Top Layer w30: v1(3055,1468) 3195,1328 JP2.4 ; v1(4633,2166) 4636.53,2169.53 R8.2
  Bottom Layer w15: v1(4660,2740) 4765,2635 v1(4765,2490)
  Bottom Layer w30: v1(3055,1468) 3935,1468 v1(4633,2166)
D2: U1.32
D3: R4.1 U1.1 | length 2404.7
  Top Layer w15: U1.1 4610.56,2990 4630,2990 4670,2950 v1(4670,2840) ; v1(5005,2485) 5005,2240 v1(5015,2230) ; v1(5545,1185) 5547.5,1187.5 5678.44,1187.5 R4.1
  Bottom Layer w15: v1(4670,2840) 5001.17,2508.83 5001.17,2488.83 v1(5005,2485) ; v1(5015,2230) 5545,1700 v1(5545,1185)
D4: R11.1 U1.2 | length 2150.1
  Top Layer w15: U1.2 4591.72,3015 4640.36,3015 4710,2945.36 v1(4710,2870) ; v1(5075,2490) 5075,2255 v1(5105,2225) ; R11.1 5672.74,1702.74 5672.74,1592.26 v1(5675,1590)
  Bottom Layer w15: v1(4710,2870) 5071.17,2508.83 5071.17,2493.83 v1(5075,2490) ; v1(5105,2225) 5570,1760 5570,1593.79 5578.79,1585 5670,1585 v1(5675,1590)
D5: R17.1 U1.9 | length 2413.2
  Top Layer w15: v1(4300,3210) 4290,3200 4290,3147.63 U1.9 ; v1(5380,2500) 5570,2310 v1(5570,2080) ; v1(5695,2105) 5695.47,2105.47 5695.47,2179.53 R17.1
  Bottom Layer w15: v1(4300,3210) 4245.5,3210 4210,3174.5 4210,3145.5 4355.5,3000 4880,3000 v1(5380,2500) ; v1(5570,2080) 5664.59,2080 5689.59,2105 v1(5695,2105)
D6: R19.1 U1.10 | length 854.2
  Top Layer w15: v1(4245,3160) 4248.83,3156.17 4248.83,3144.97 U1.10 ; v1(4890,3155) 4895.41,3155 4910.41,3140 R19.1
  Bottom Layer w15: v1(4245,3160) 4247.5,3157.5 4887.5,3157.5 v1(4890,3155)
D7: U1.11
D8: U1.12
D9: U1.13
D10: U1.14
D11/MOSI: U1.15
D12/MISO: J2.1 U1.16 | length 1342.3
  Top Layer w15: v1(3960,2270) 3960,2582.71 3965,2587.71 3965,2895 4088.79,3018.79 4107.72,3018.79 U1.16
  Bottom Layer w15: J2.1 3725,2035 v1(3960,2270)
D13/SCK: J2.3 R7.1 U1.17 | length 1485.8
  Top Layer w15: v1(3740,2317) 3822,2235 4035,2235 4035,2725.56 U1.17
  Top Layer w30: v1(3740,2317) 3759.53,2336.53 R7.1
  Bottom Layer w30: J2.3 3740,2235 v1(3740,2317)
DB4: LCD1.11 U5.9 | length 1740.4
  Bottom Layer w30: LCD1.11 1899,3115 2530,2484 U5.9
DB5: LCD1.12 U5.10 | length 2115.3
  Bottom Layer w30: LCD1.12 1899,3215 2595,2519 2595,1622.22 2552.78,1580 2485,1580 2430,1635 U5.10
DB6: LCD1.13 U5.11 | length 2458.8
  Bottom Layer w30: LCD1.13 1899,3315 2670,2544 2670,1615 2595,1540 2425,1540 2330,1635 U5.11
DB7: LCD1.14
DP7: U5.12
GND: BTN1.1 C1.2 C2.2 C3.1 C4.2 C5.2 C6.2 C8.2 C9.1 C10.2 C11.1 C12.1 C13.2 C15.2 C19.1 D2.1 FT?.7 FT?.18 FT?.21 FT?.25 GREEN_TX1.1 J1.5 J2.6 JP1.2 JP2.2 L_AMBER1.2 LCD1.1 LM1.3 LM1.5 Q1.3 Q2.3 Q3.3 R6.2 R12.2 R18.2 R27.2 T1.2 T2.1 U1.3 U1.5 U1.21 U2.2 U2.3 U3.2 U3.3 U4.2 U4.3 U5.1 U5.2 U5.3 U5.8 U6.2 U6.3 U7.2 X1.8 YELLOW_RX1.1 | length 29433.3
  Top Layer w15: U1.21 4373.01,2885.38 4416.85,2885.38 U1.3 4521.32,2993.39 4544.48,3016.55 4544.48,3032.46 4520.08,3056.85 4499.22,3056.85 ; U1.5 4499.22,3056.85 ; BTN1.1 4635.7,3474.3 4635.7,3327.98 4630,3322.29 4630,3180.5 4555.67,3106.18 4548.55,3106.18 4499.22,3056.85 ; 4849,1568.23 4868.57,1587.8 FT?.7 ; v1(5040,1325) 5170.69,1455.69 5170.69,1474.96 5180.94,1485.22 5217.5,1485.22 FT?.18 5217.5,1485.65 5180.94,1485.65 5170.69,1495.9 5170.69,1551.74 5180.94,1561.99 5217.5,1561.99 FT?.21 ; J1.5@5139,1242 5141.34,1244.34 5141.34,1295.93 5155,1309.59 v1(5155,1315) ; FT?.25 5286.43,1664.57 5295,1656 ; v1@5222.3,1143.99 5222.3,1196.13 J1.5@5254.17,1228
  Top Layer w30: v1(1775,2090) 1775,1498 1830,1443 v1(1830,1415) ; C2.2 C1.2 3635.57,2733.37 L_AMBER1.2 ; v1(3670,1230) 3876,1230 3878,1228 4849,1228 ; v1(3725,4375) 3705,4355 D2.1 3630,4355 LM1.3 3630,4650 3680,4700 3720,4700 3762.5,4657.5 ; LM1.5 3762.5,4657.5 ; v1(3810,4245) 3850,4205 3955,4205 ; v1(3855,2445) 3855,2624 3745.63,2733.37 L_AMBER1.2 ; C12.1 3850,4745 3762.5,4657.5 ; C11.1 C11.1@4106,4205 ; C4.2 4204,1622.43 4273.8,1692.23 C3.1 4368,1692.23 4395.77,1720 C8.2 4513,1720 4515.77,1717.23 C9.1 ; C6.2 4527.89,3687.89 C5.2 4168.11,3687.89 4106,3750 C11.1@4106,4205 ; J1.5@4899.83,1228 4849,1228 ; U6.2 5185,3149.53 5294.53,3040 5340,3040 ; J1.5@5254.17,1228 5375,1228 5412.57,1265.57 C10.2 C10.2@5420,1314.87 ; 5286.43,1664.57 5276,1675 5276,1800 5296,1820 ; 5295,1656 YELLOW_RX1.1 ; v1(5366.06,4550) 5702.43,4550 5745,4507.43 5745,3445 5340,3040 ; GREEN_TX1.1 C10.2@5420,1314.87 ; v1(5641.38,2495.48) v1(5641.38,2121.38) 5641.38,2050 ; R6.2 R6.2@5694.96,1320 ; R18.2 v1(5800,2280) ; U4.2 6085,2025 ; U4.3 v1(6183.21,2447.32) ; U2.2 v1(6100,1390) U2.3 6100,1494.05 6085,1509.05 U3.2 U3.3 ; v1(6147.32,1905) U3.3 ; L_AMBER1.2 3702.87,2968.87 4010,3276 4010,4150 3955,4205 ; 3955,4205 C11.1@4106,4205 ; C9.1 4700,1717.23 4849,1568.23 4849,1228 ; C9.1 4569.87,1750 4639.87,1820 5250,1820 ; 5250,1820 5296,1820 ; 5250,1820 5185,1885 U6.3 5185,2885 5340,3040 ; 5296,1820 v1(5584.52,1820) 5658.88,1820 5641.38,1837.5 ; C10.2@5420,1314.87 5689.83,1314.87 R6.2@5694.96,1320 ; 5641.38,1837.5 R12.2 5690,1800 5652,1762 5650,1762 5625.79,1737.79 5625.79,1389.17 R6.2@5694.96,1320 ; 5641.38,1837.5 5641.38,2050 ; 5641.38,2050 5886.57,2050 5893.18,2043.39 6066.61,2043.39 6085,2025 ; U3.3 6085,2025
  Top Layer w50: C6.2 4597.89,3615.95 4630.13,3583.71 BTN1.1
  Bottom Layer w15: v1(5040,1325) 5040,1200 5115,1125 5115,1116.88 5146.58,1085.3 5180.65,1085.3 5204.74,1109.39 5204.74,1115.6 5214.55,1125.41 v1(5214.55,1130.82) 5214.55,1255.45 v1(5155,1315)
  Bottom Layer w30: T1.2 1307,1370 1307,1390 1400,1390 1435,1355 1435,1350 1490,1295 T2.1 1750,1295 1785.13,1259.87 C19.1 1836,1217.23 1838.7,1214.53 R27.2 1890,1262 1930,1302 U5.2 ; v1(1775,2090) 1776.35,2090 1795,2108.65 1878.65,2108.65 LCD1.1 ; v1(1830,1415) U5.1 U5.2 ; J2.6 3690,2385 3850,2385 ; v1(3670,1230) 3590,1230 ; v1(3725,4375) C13.2 v1(3810,4245) ; JP1.2 3590,1230 ; v1(3855,2445) 3854.04,2444.04 3854.04,2389.04 3850,2385 ; U7.2 5220,4483.94 5300,4483.94 ; C15.2 5315,4483.94 5300,4483.94 ; v1(5366.06,4550) 5300,4483.94 ; v1(5584.52,1820) 6149.52,2385 ; v1(5641.38,2121.38) v1(5800,2280) ; v1(5641.38,2495.48) 6135.05,2495.48 v1(6183.21,2447.32) ; v1(6100,1390) Q1.3 ; v1(6147.32,1905) Q2.3 ; Q3.3 6149.52,2385 ; U5.2 U5.3 2035.53,1344.47 2035.53,1077.57 2053.11,1060 2506.89,1060 2524.47,1077.57 2524.47,1344.47 U5.8 2945,1350 2995,1300 JP2.2 3185,1250 3570,1250 3590,1230 ; 3850,2385 6149.52,2385
  Bottom Layer w50: U7.2 5315.2,4615 5344.49,4644.29 5344.49,4760.13 5369.09,4784.72 6069.72,4784.72 X1.8
K: LCD1.16 T1.3 | length 3275.6
  Top Layer w30: v1(1077,1561) v1(1346,1292)
  Bottom Layer w30: v1(1077,1561) 1077,3550 1142,3615 LCD1.16 ; v1(1346,1292) 1343,1295 1343,1345 T1.3
NetBTN2_1: BTN2.1 C14.2 R22.2 | length 358.5
  Top Layer w30: BTN2.1 1130,4400 1172.43,4442.43 C14.2 1368,4442.43 1375.57,4450 R22.2
NetBTN3_1: BTN3.1 C17.2 R26.2 | length 364.6
  Top Layer w30: BTN3.1 1130,3502.43 1200,3572.43 C17.2 1363,3572.43 1376.05,3585.47 R26.2
NetBTN4_1: BTN4.1 C18.2 R28.2 | length 372
  Top Layer w30: BTN4.1 1120,2800 1170,2850 C18.2 1354,2850 1374.47,2870.47 R28.2
NetC5_1: C5.1 U1.8 XT1.3 | length 640.2
  Top Layer w15: U1.8 4455,3145.56 4455,3160 4367.47,3247.53 4367.47,3547.47 XT1.3 4455,3635 C5.1
NetC6_1: C6.1 U1.7 XT1.1 | length 587.6
  Top Layer w15: U1.7 4432.23,3082.48 4451.66,3101.92 4451.66,3103.34 4480,3131.67 4480,3200 4434.29,3245.71 4434.29,3480.66 XT1.1 4520.41,3566.79 4543.21,3566.79 C6.1
NetC7_1: C7.1 FT?.2 | length 775
  Top Layer w15: C7.1 4485,1995 v1(4590,1890) ; v1(4860,1690) 4885.75,1715.75 FT?.2
  Bottom Layer w15: v1(4590,1890) v1(4590,1890) 4630,1890.05 4649.95,1910 4695,1910 4711.08,1893.92 4711.08,1784.42 4778.34,1717.16 4830.6,1717.16 4857.76,1690 v1(4860,1690)
NetC12_2: C12.2 C13.1 D1.1 L1.2 LM1.4 | length 2099.4
  Top Layer w30: LM1.4 3700,4481.73 3725,4456.73 v1(3828.27,4456.73) ; C13.1 C13.1@3911.22,4376.23 ; D1.1 4263.19,3901.93 4263.19,4258.87 4219.5,4302.56 3984.89,4302.56 C13.1@3911.22,4376.23 ; C12.2 4222,4745 4222,4687 C13.1@3911.22,4376.23
  Bottom Layer w30: v1(3828.27,4456.73) C13.1 3940,4345 L1.2
NetC16_1: C16.1 D6.A R20.2 X1.1 | length 1317.4
  Bottom Layer w30: C16.1 5140,3645 5200,3585 D6.A 5489.49,3610.67 R20.2 5489.49,3979.49 X1.1
NetC16_2: C16.2 ic1.2 ic1.3 ic1.7 ic1.8 | length 1394.2
  Bottom Layer w50: ic1.3 ic1.2 4755,4690 ic1.7 ic1.8 4940,4095 C16.2
NetC20_2: C20.2 ic1.1 | length 197.8
  Bottom Layer w30: ic1.1 4815,4650 C20.2
NetD2_2: D2.2 L1.1 LM1.2 | length 712.4
  Top Layer w30: v1(3482.52,4282.48) D2.2 3540,4355 3560,4375 LM1.2
  Bottom Layer w30: v1(3482.52,4282.48) L1.1
NetD3_1: D3.1 RL1.4 U6.4 | length 750.4
  Top Layer w30: U6.4 5285,2836.96 5374.3,2926.26 D3.1 5585,2802.56 v1(5635,2752.56)
  Bottom Layer w30: v1(5635,2752.56) RL1.4
NetD3_2: D3.2 RL1.5 | length 394.7
  Top Layer w30: D3.2 5585,3214.29 v1(5595.71,3225)
  Bottom Layer w30: v1(5595.71,3225) RL1.5
NetD4_2: D4.2 R20.1 | length 354.8
  Bottom Layer w30: R20.1 6445,4024.49 D4.2
NetD5_A: D5.A X1.2 | length 259.1
  Bottom Layer w30: D5.A 5655,4865 X1.2
NetD6_C: D6.C D7.2 | length 158
  Bottom Layer w30: D6.C 5976.18,3595 D7.2
NetD7_1: D7.1 ic1.5 X1.7 | length 3605.9
  Bottom Layer w30: ic1.5 4440,4774.85 4380,4714.85 4380,4255 5255,3380 6054.5,3380 6205,3530.5 6205,3565 D7.1 6225.43,3604.57 6225.43,4089.57 X1.7
NetD8_1: D8.1 U7.1 | length 293.3
  Bottom Layer w30: D8.1 4930.94,4410.94 5120,4600 U7.1
NetD8_2: D8.2 R25.2 | length 156.3
  Bottom Layer w50: D8.2 4921.56,4277.5 5073.44,4277.5 R25.2
NetFT?_15: FT?.15 J1.3 | length 243.9
  Top Layer w15: J1.3 5079.34,1243.34 5079.34,1291.73 5162.62,1375 5171.55,1375 5177.87,1381.32 5177.87,1390.47 5195.69,1408.29 5217.34,1408.29 FT?.15
NetFT?_16: FT?.16 J1.2 | length 503.7
  Top Layer w15: J1.2 5048.34,1238.16 5048.34,1190.77 5059.91,1179.21 5155.09,1179.21 5175,1199.12 5175,1275 5264.89,1364.89 5264.89,1423.64 5254.49,1434.04 5217.93,1434.04 FT?.16
NetFT?_22: FT?.22 R14.1 | length 172.9
  Top Layer w15: FT?.22 5217.93,1587.58 5254.49,1587.58 5264.74,1577.33 5264.74,1545.72 5312.84,1497.62 5317.91,1497.62 5329.11,1486.42 R14.1
NetFT?_23: FT?.23 R13.1 | length 224.4
  Top Layer w15: FT?.23 5368.9,1613.39 5420,1664.49 R13.1
NetGREEN_TX1_2: GREEN_TX1.2 R14.2 | length 95.2
  Top Layer w30: R14.2 5369,1544.49 5379.51,1555 GREEN_TX1.2
Netic1_4: ic1.4 U7.4 | length 380
  Bottom Layer w30: ic1.4 5120,4895 U7.4
NetL2_2: L2.2 R27.1 | length 448.7
  Bottom Layer w30: L2.2 1566,1075 1582,1059 1850,1059 1890,1099 R27.1
NetL_AMBER1_1: L_AMBER1.1 R7.2 | length 99.4
  Top Layer w30: R7.2 3700.47,2592 3702.87,2594.4 L_AMBER1.1
NetP1_1: P1.1 Q1.2 | length 395.4
  Bottom Layer w30: Q1.2 6700,1290 6725,1315 P1.1
NetP2_1: P2.1 Q2.2 | length 420.4
  Bottom Layer w30: Q2.2 6700,1805 6725,1830 P2.1
NetP3_1: P3.1 Q3.2 | length 421.9
  Bottom Layer w30: Q3.2 6665,2285 6730,2350 P3.1
NetP4_2: P4.2 RL1.1 | length 967.8
  Bottom Layer w50: RL1.1 6693.94,2988.78 6715.16,3010 P4.2
NetQ1_1: Q1.1 R3.2 R6.1 | length 814.2
  Top Layer w30: R6.1 R6.1@5755.98,1320 ; R3.2 5762.57,1326.59 R6.1@5755.98,1320 ; v1(5883.65,1320) R6.1@5755.98,1320
  Bottom Layer w30: v1(5883.65,1320) 6013.65,1190 Q1.1
NetQ2_1: Q2.1 R10.2 R12.1 | length 815.1
  Top Layer w30: R10.2 5764.8,1889.75 5749.06,1874 R12.1 5813.65,1820 ; v1(6155.96,1729.04) v1(6295.96,1729.04)
  Bottom Layer w30: 5813.65,1820 6065,1820 v1(6155.96,1729.04) ; v1(6295.96,1729.04) 6320,1705 Q2.1
NetQ3_1: Q3.1 R16.2 R18.1 | length 859.1
  Top Layer w30: R18.1 R18.1@5691.93,2280 ; R16.2 5695.67,2283.74 R18.1@5691.93,2280 ; v1(6131.41,2185) 6092.71,2223.7 5732.56,2223.7 5695.63,2260.63 5695.63,2276.3 R18.1@5691.93,2280
  Bottom Layer w30: v1(6131.41,2185) Q3.1
NetR1_2: R1.2 R3.1 U2.4 | length 497.3
  Top Layer w30: R3.1 5696.39,1456.23 5696.39,1467.96 5758.43,1530 5810,1530 5830,1510 5830,1418.52 5847.57,1400.94 R1.2 5941.42,1400.94 6000,1459.53 U2.4
NetR4_2: R4.2 U2.1 | length 283.9
  Top Layer w30: R4.2 5951.54,1190 6000,1141.54 U2.1
NetR9_2: R9.2 R10.1 U3.4 | length 406.4
  Top Layer w30: R10.1 5690,1975 5720,2005 5862.43,2005 5880,1987.43 R9.2 5961.07,1939.53 5985,1963.46 U3.4
NetR11_2: R11.2 U3.1 | length 325.4
  Top Layer w30: R11.2 v1(5810,1705) ; v1(5980.96,1705) 5980.96,1636.72 U3.1
  Bottom Layer w30: v1(5810,1705) v1(5980.96,1705)
NetR13_2: R13.2 YELLOW_RX1.2 | length 99.8
  Top Layer w30: YELLOW_RX1.2 5363,1746 5384.47,1724.53 R13.2
NetR15_2: R15.2 R16.1 U4.4 | length 397.4
  Top Layer w30: R15.2 5841.06,2305.47 5770.47,2376.06 R16.1 5770.47,2383.94 5833.86,2447.32 U4.4
NetR17_2: R17.2 U4.1 | length 287.1
  Top Layer w30: R17.2 5967.5,2180 5985,2162.5 U4.1
NetR19_2: R19.2 U6.1 | length 333.8
  Top Layer w30: R19.2 5078,3140 5113,3175 5113,3200 5144.61,3231.61 5228.5,3231.61 5285,3175.12 U6.1
P3: R21.2 T1.1 U5.7 | length 1624.9
  Top Layer w30: v1(1282,1279) 1420.5,1140.5 v1(2370.5,1140.5)
  Bottom Layer w30: v1(1282,1279) T1.1@1282,1320 ; T1.1 1290,1274 1315,1249 1380,1249 1380,1205 R21.2 ; v1(2370.5,1140.5) 2430,1200 U5.7
RESET: BTN1.2 C7.2 J2.5 R2.1 U1.29 | length 2890.9
  Top Layer w15: 4485,2311 4521.85,2347.85 4521.85,2560.5 4527.3,2565.96 4527.3,2773.86 4499.4,2801.76 U1.29
  Top Layer w30: v1(3670,2280) 3775,2175 4480.2,2175 C7.2 4485,2311 ; 4521.85,2347.85 4825,2651 BTN1.2 4825,3470 R2.1
  Bottom Layer w30: J2.5 3640,2242.86 3669.04,2271.91 3669.04,2279.04 v1(3670,2280)
RS: LCD1.4
RW: LCD1.5 U5.5 | length 2517.1
  Top Layer w30: v1(1665,2515) 1476,2515 1475,2514 1475,1300 1544,1231 v1(2161,1231)
  Bottom Layer w30: v1(1665,2515) LCD1.5 ; v1(2161,1231) 2161.96,1231.96 2206.96,1231.96 2235,1260 2235,1345 U5.5
RX: FT?.5 R5.1 | length 682.2
  Top Layer w15: R5.1 4585,1960 v1(4670,1875) ; v1(4680,1760) 4735.5,1760 4856.53,1638.98 FT?.5
  Bottom Layer w15: v1(4670,1875) 4670,1775.41 4680,1765.41 v1(4680,1760)
SR: U5.4
TX: FT?.1 R8.1 | length 549
  Top Layer w15: R8.1 4680,1990 v1(4790,1880) ; v1(4790,1755) 4795.41,1755 4809.07,1741.34 FT?.1
  Bottom Layer w15: v1(4790,1755) v1(4790,1880)
VO: LCD1.3 T2.2 | length 1194.8
  Top Layer w30: T2.2 1532.5,1395 1515,1412.5 1515,2059 v1(1771,2315)
  Bottom Layer w30: v1(1771,2315) LCD1.3
pads on no net: FT?.3 FT?.6 FT?.8 FT?.9 FT?.10 FT?.11 FT?.12 FT?.13 FT?.14 FT?.19 FT?.20 FT?.24 FT?.26 FT?.27 FT?.28 J1.4 J2.4 LCD1.7 LCD1.8 LCD1.9 LCD1.10 LM1.6 R21.1 RL1.3 U5.13 X1.19 X1.20 X1.23 X1.24 XT1.2
copper on no net:
  other v2: 4990.39,1126.43 5163.61,1126.43

## Polygon pours and split planes (outlines as drawn)
GND on Bottom Layer "GND_L02_P001" (solid, pour order 1): 1010.08,5000 6990,5000 6990,1010 6975,1025 1025,1025
GND on Top Layer "GND_L01_P000" (solid, remove dead copper, pour order 0): 1045,5020 3345,5000 3385,4995 3385,4805 3925,4805 3945,4825 3945,5005 6990,4990 7000,4855 7000,4740 6995,1005 1045,1005 1000,1005 990,4990 1020,4990 1060,5005

## Text inside footprints (layer, text, board x,y; h text height)
J2: Top Overlay "6" at 3560,2295 h50 r90; Top Overlay "5" at 3660,2295 h50 r90; Top Overlay "2" at 3560,1935 h50 r90; Top Overlay "1" at 3660,1955 h50 r90